# Altium PCB ESense.PcbDoc (part 1 of 3)
Units mil, origin at the board's own origin, x right, y up, seen from the top; angles counter-clockwise.
Board outline 9200 x 6300 mil, 4 copper layers (Top Layer, GND, POWER, Bottom Layer); 365 components, 215 nets, 1056 pads, 220 vias.
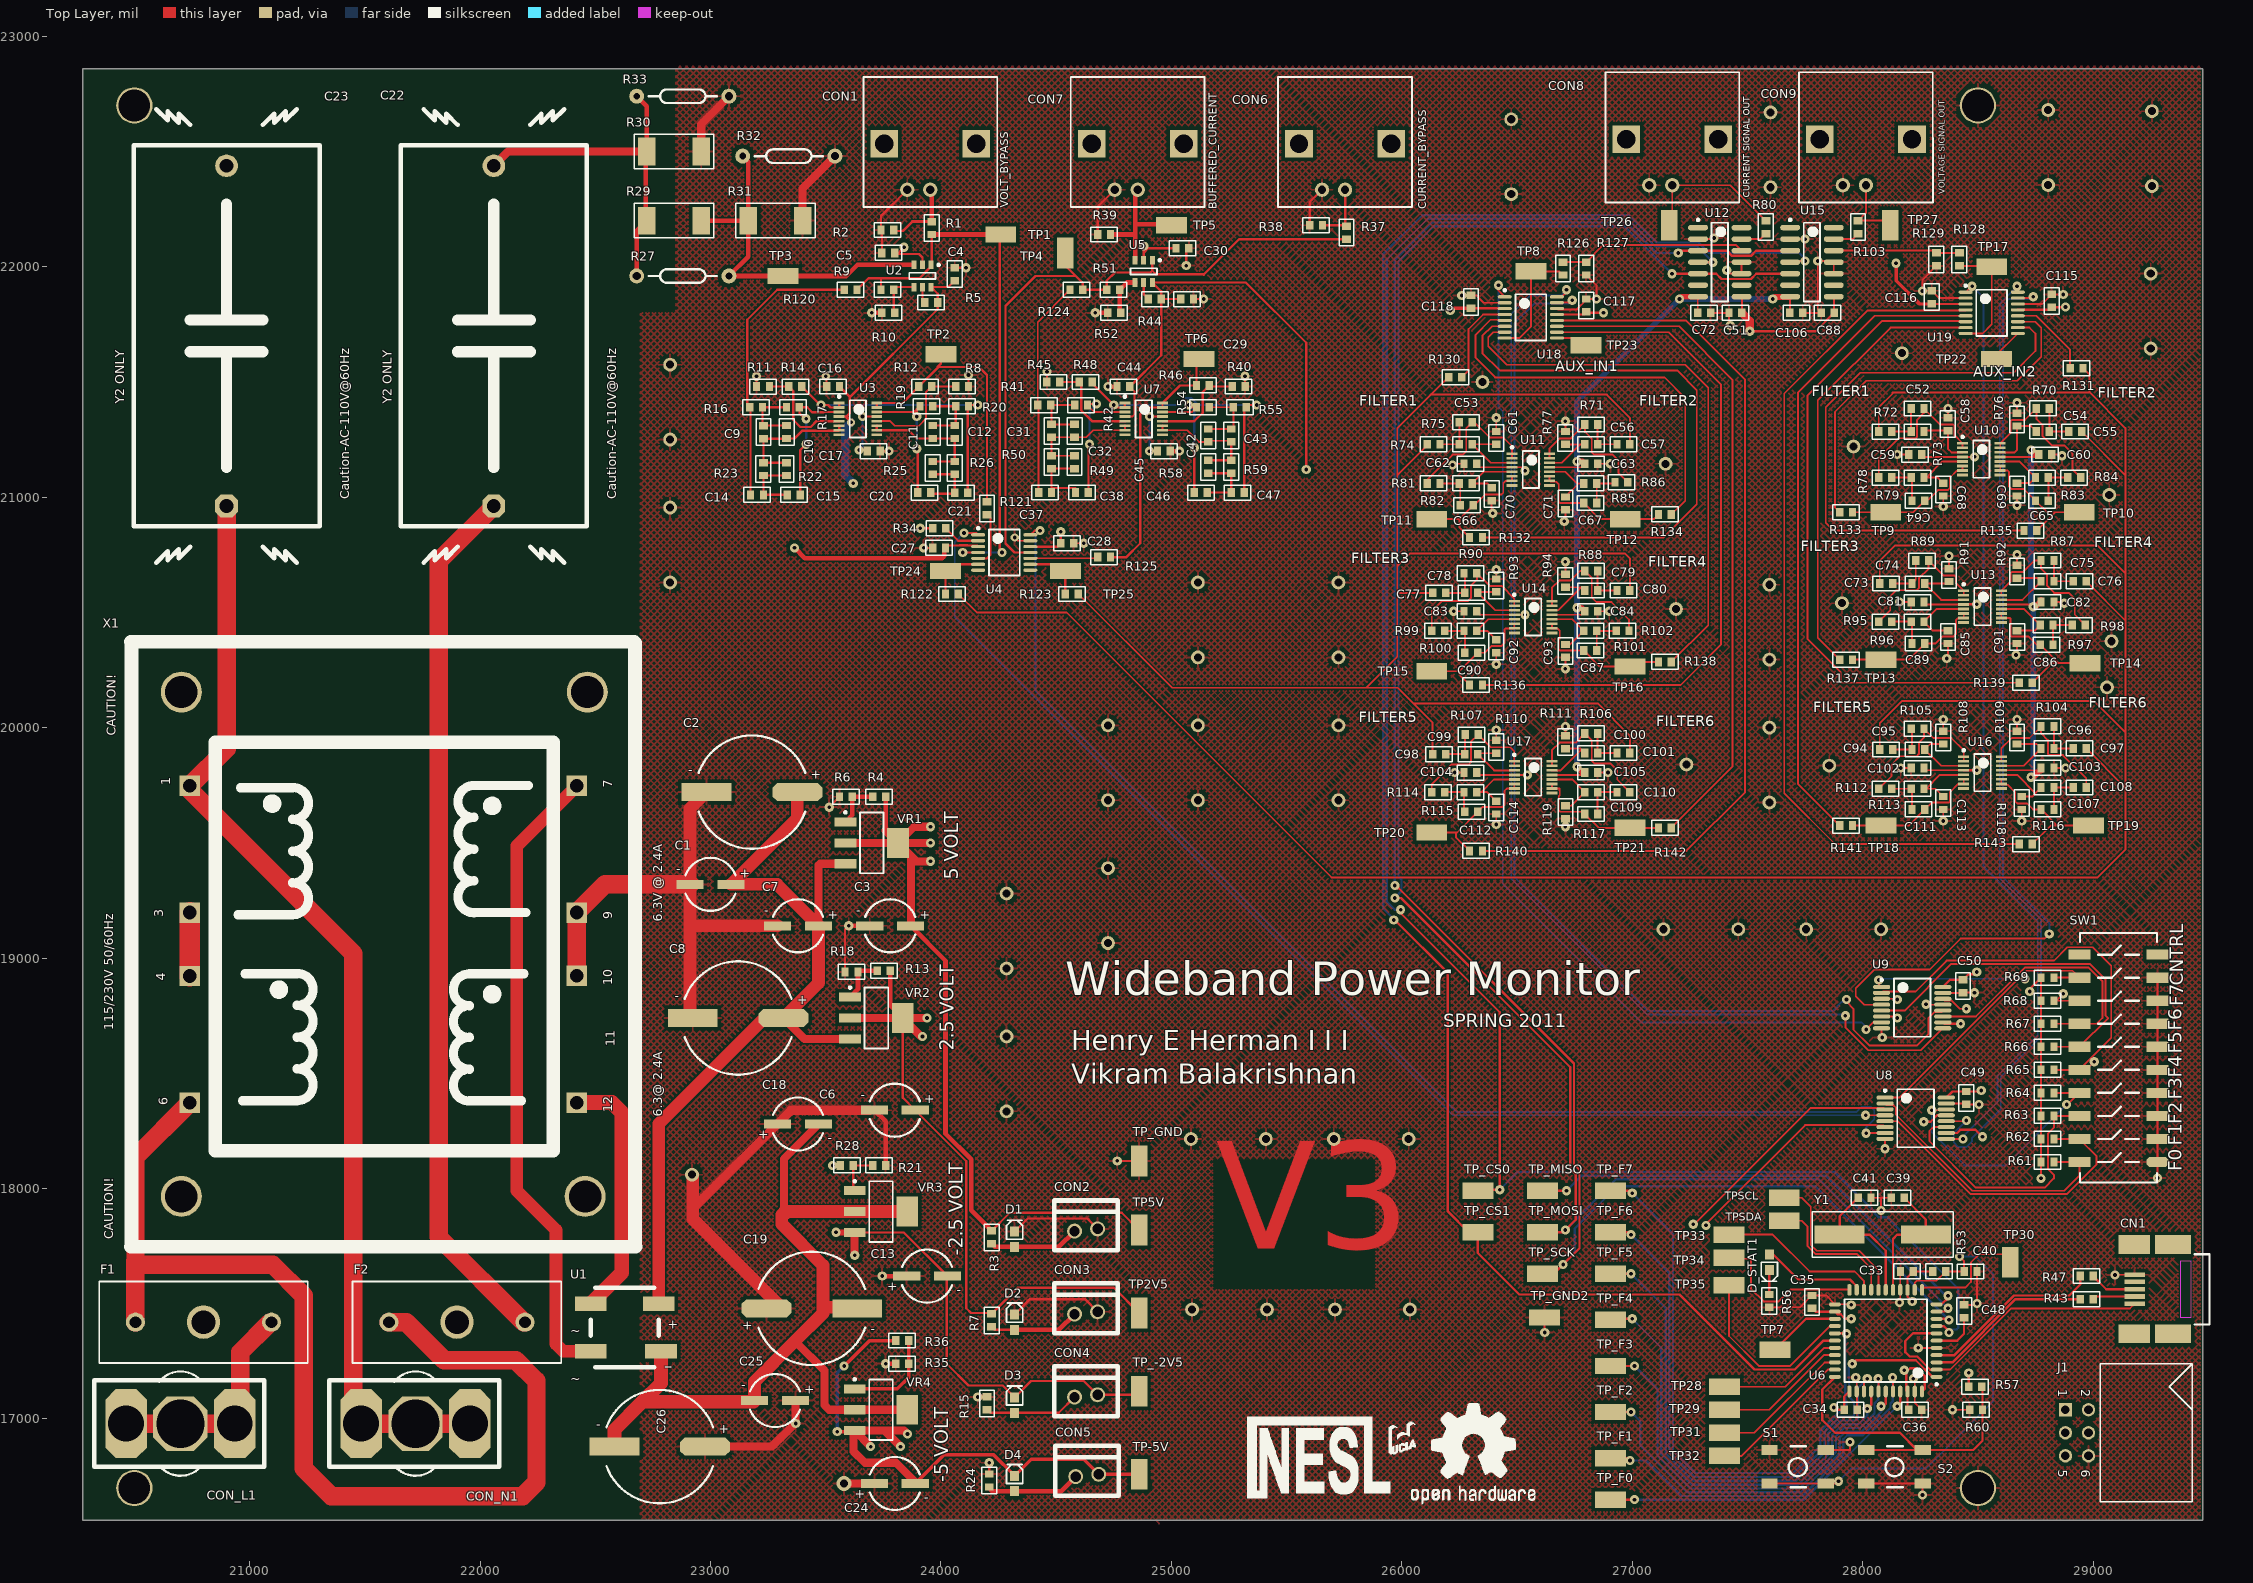
[diagram p0: Top Layer view]
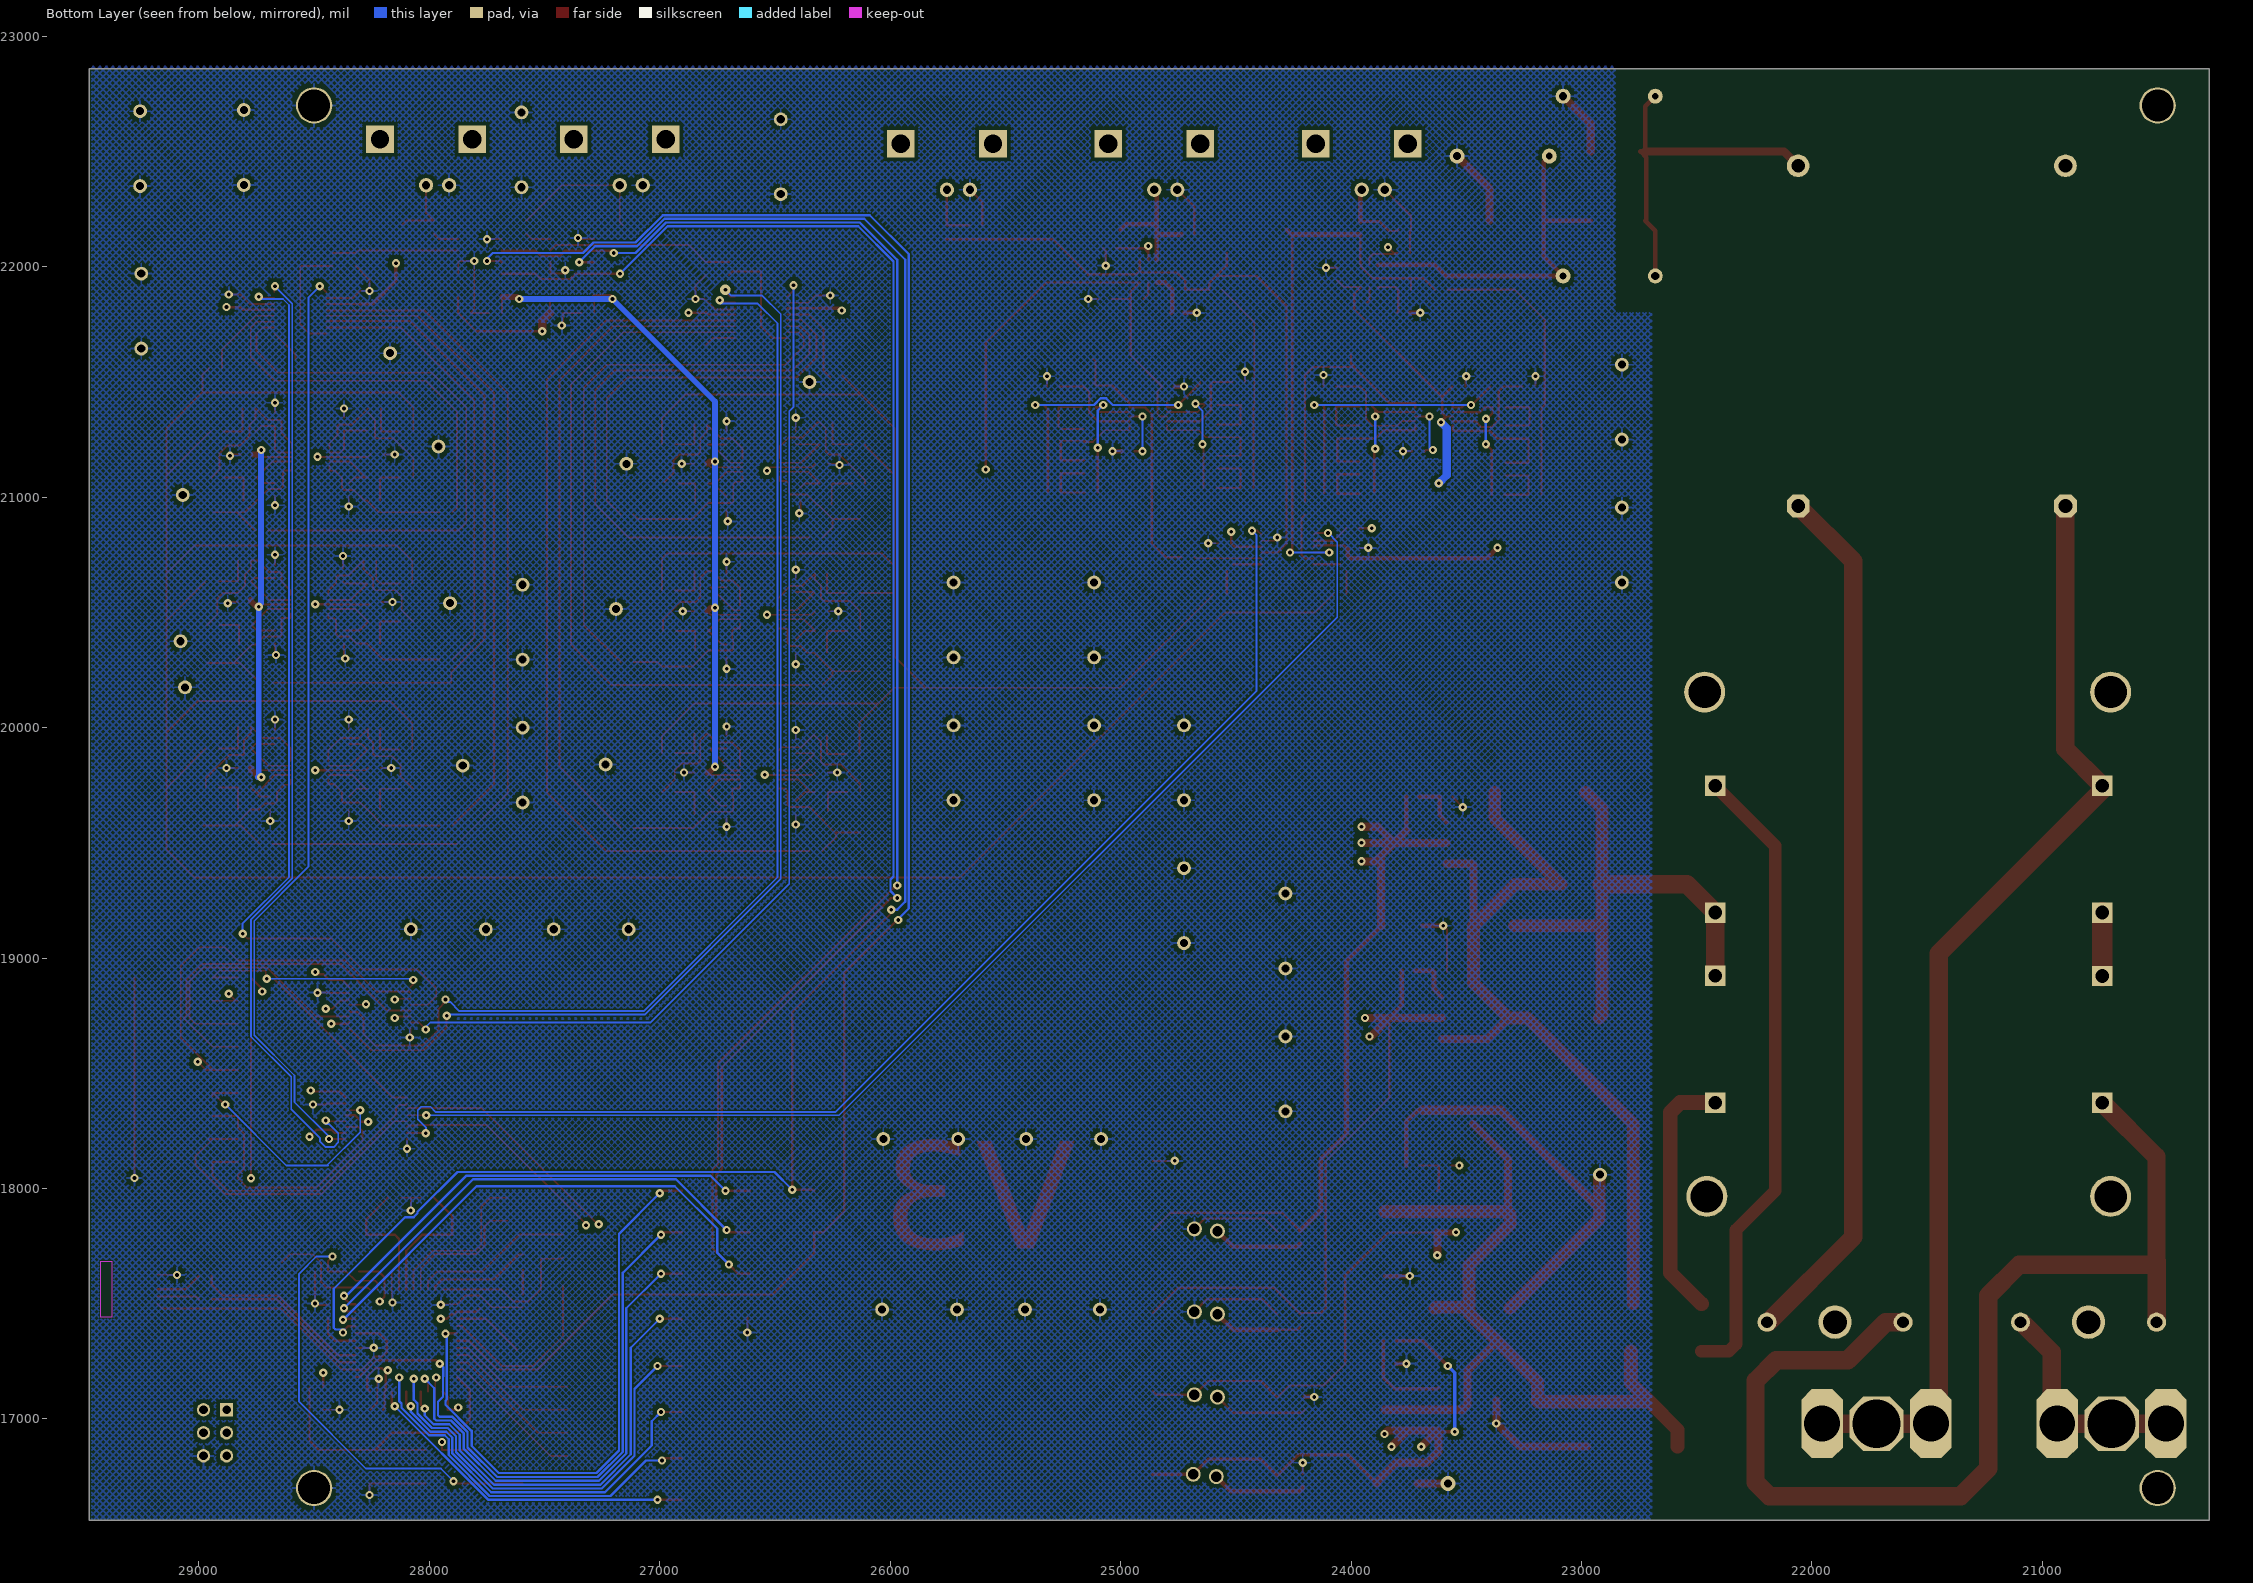
[diagram p1: Bottom Layer view, seen from below]
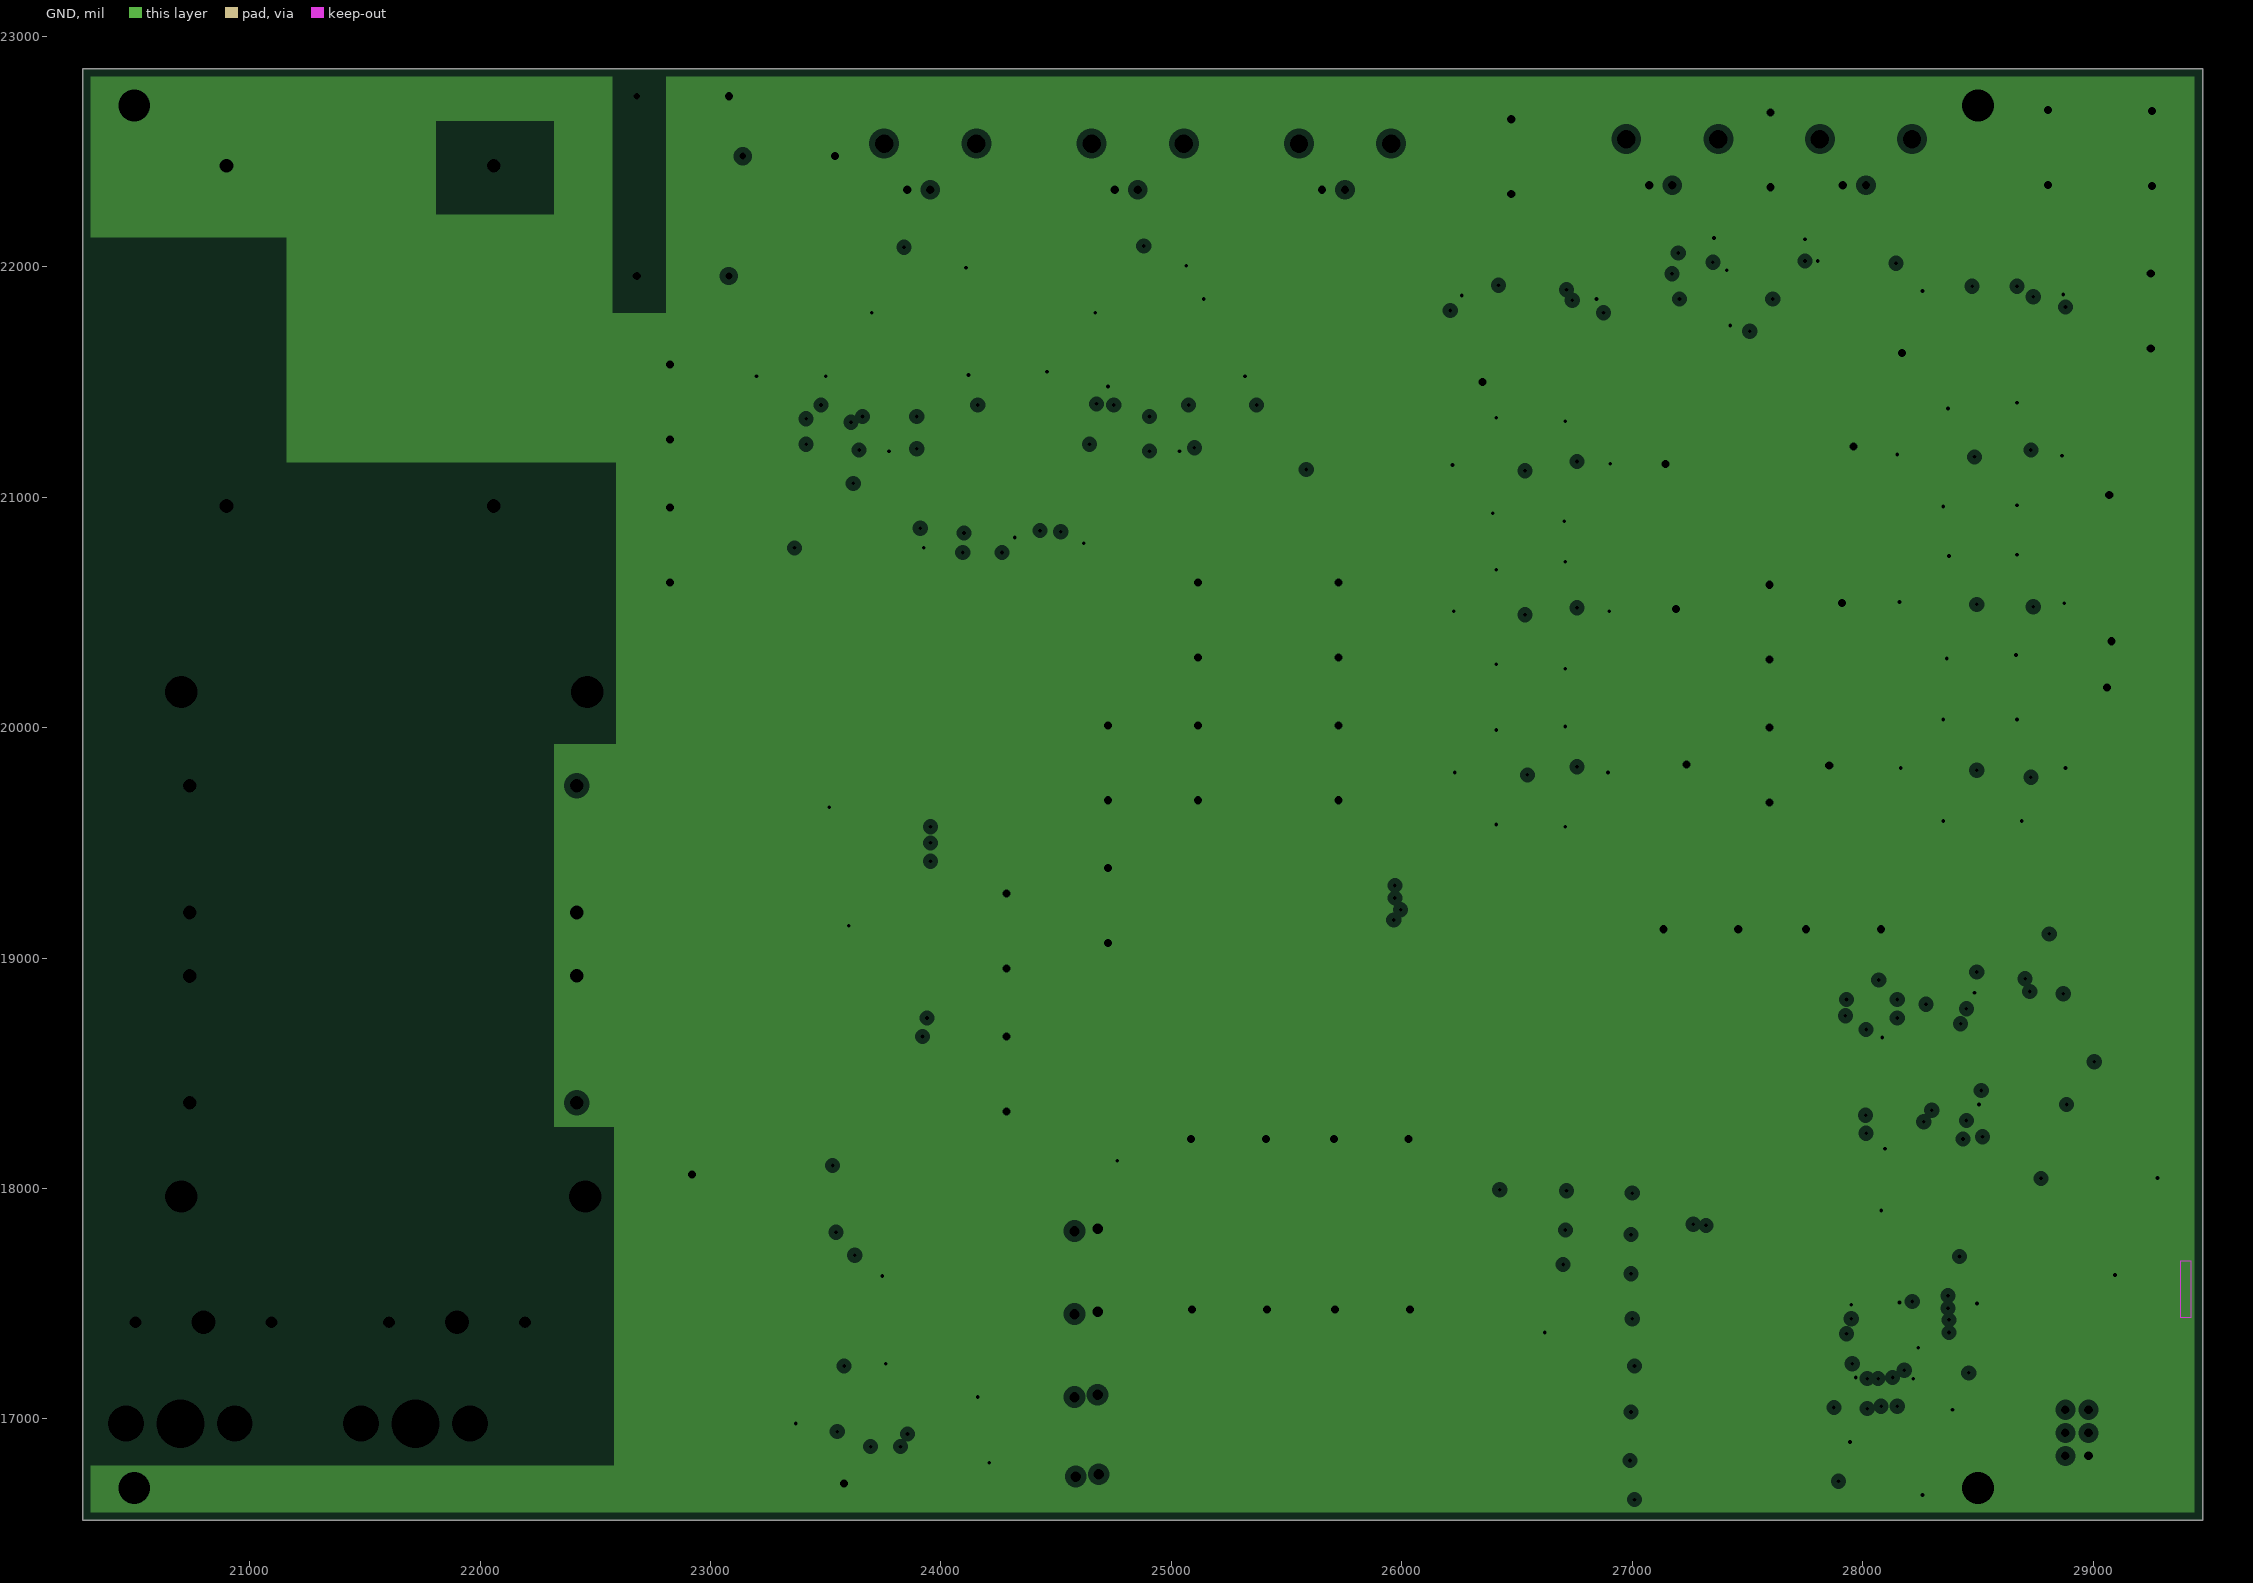
[diagram p2: GND, clearances drawn from the general rule]
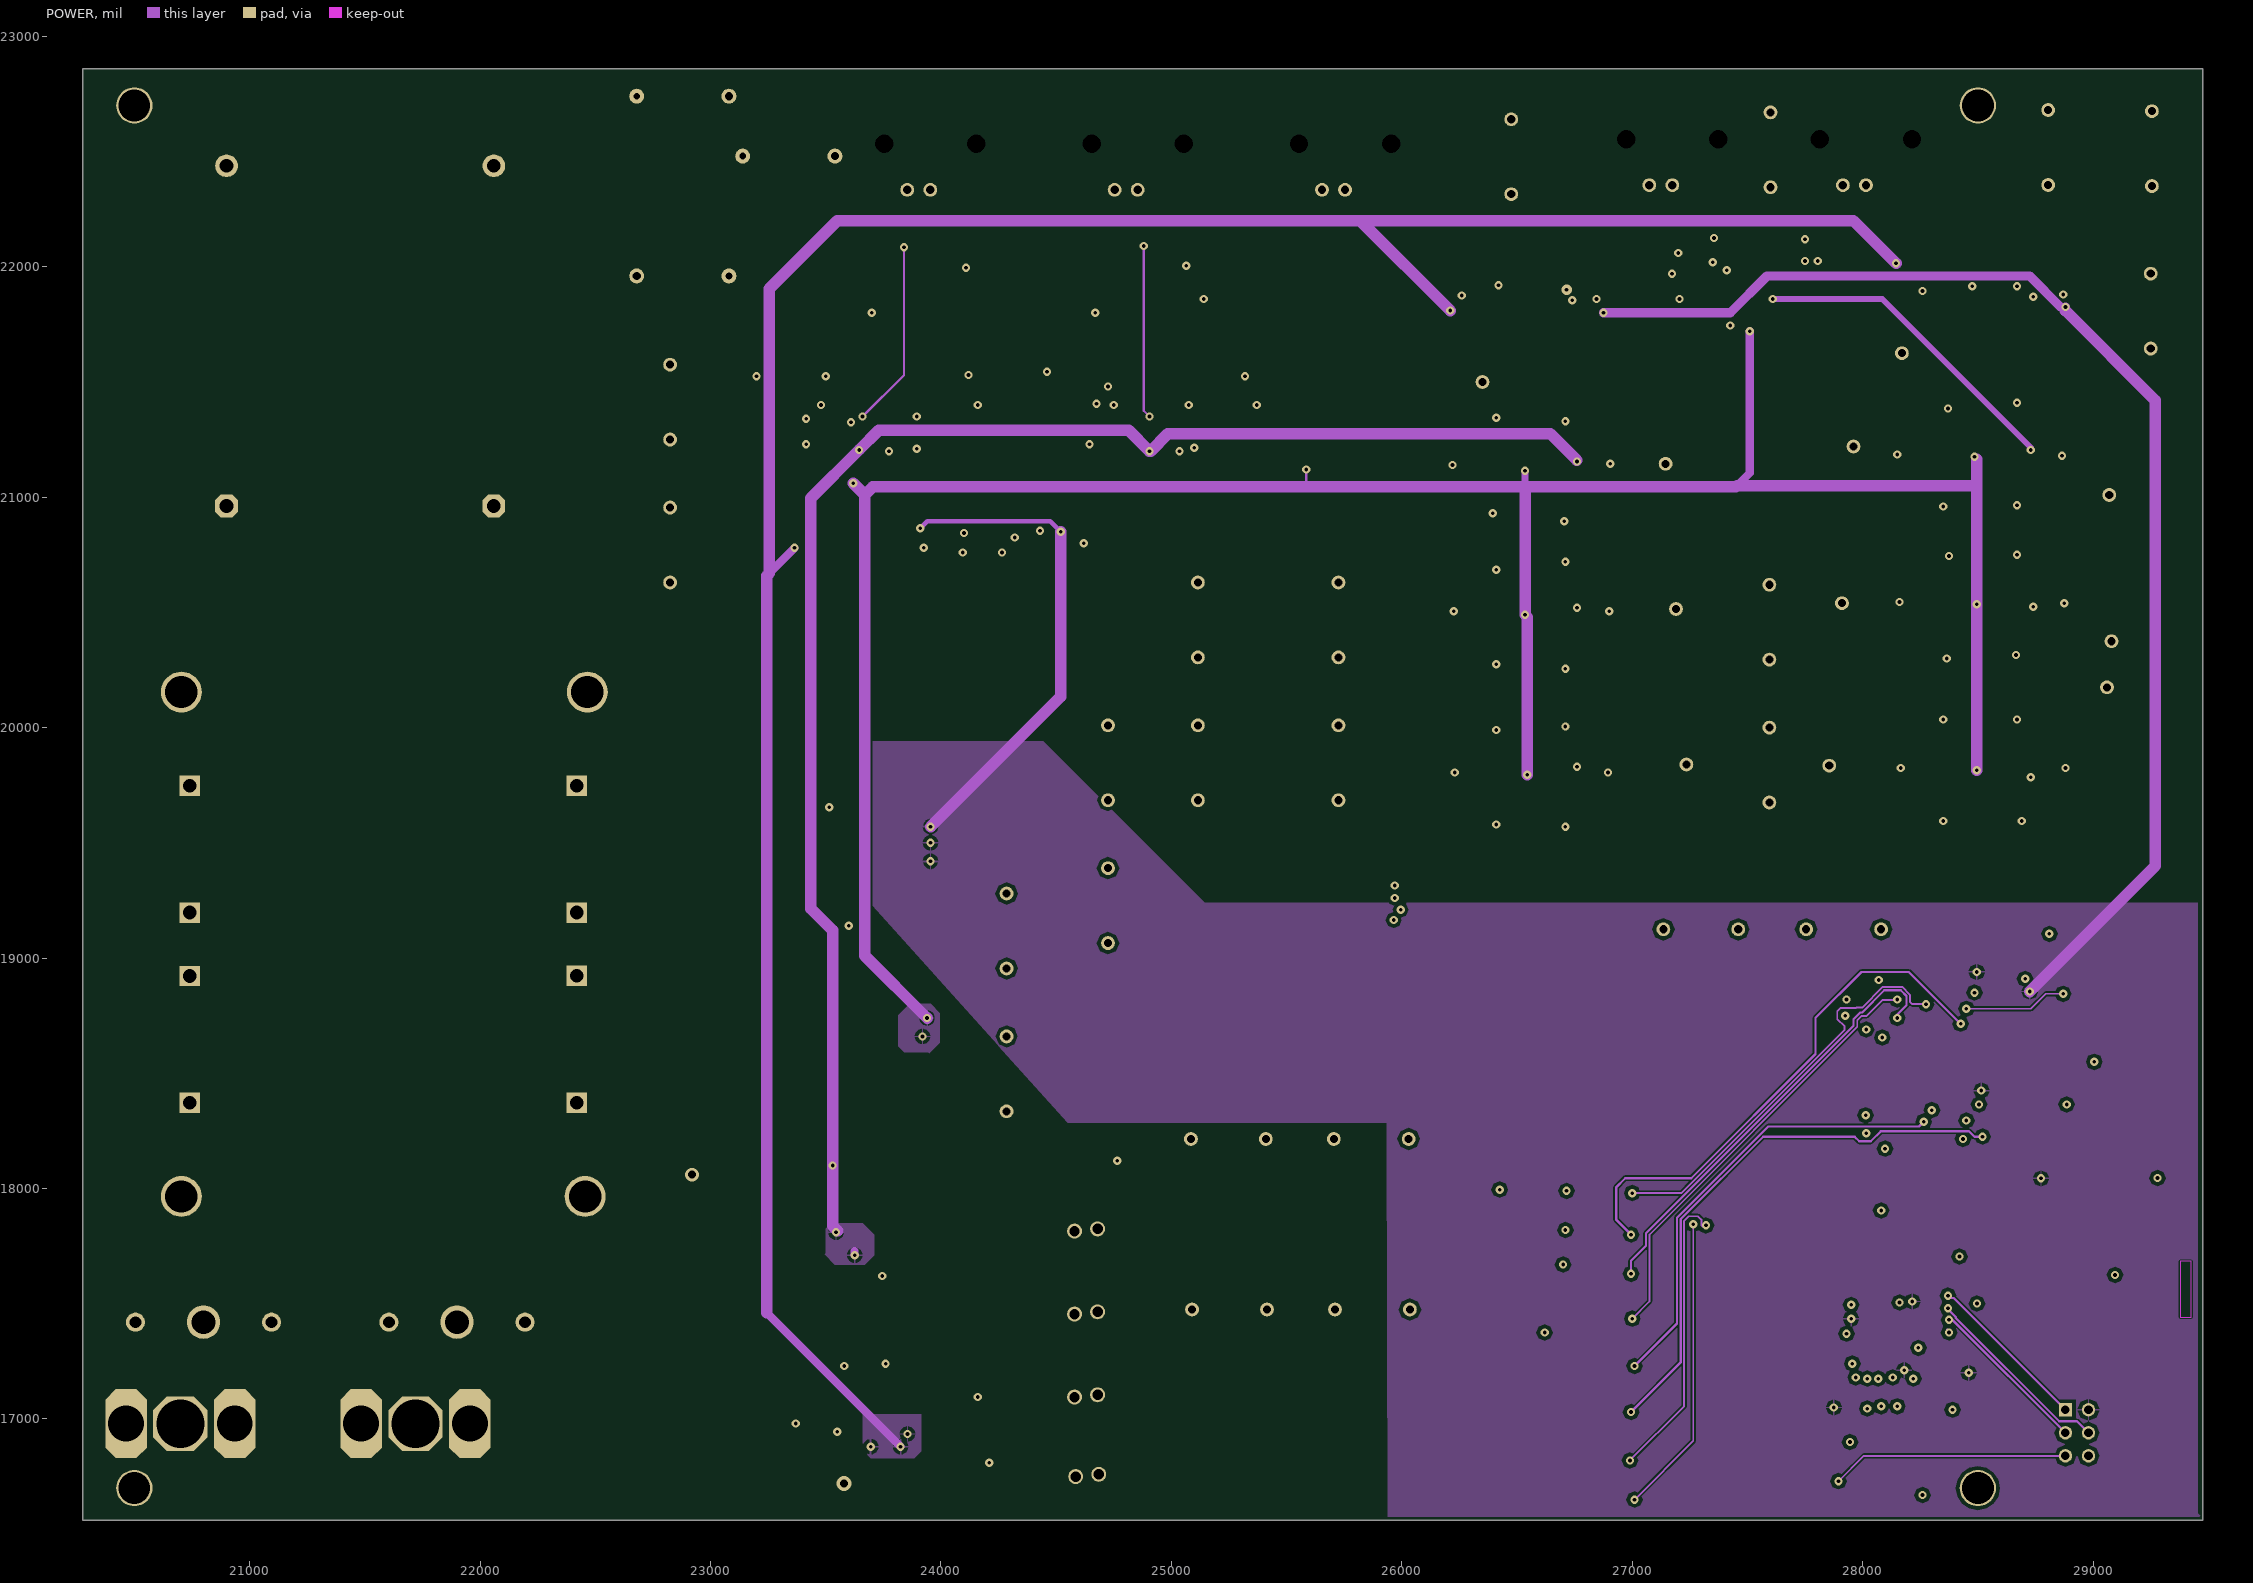
[diagram p3: POWER]

## Layer stack, top to bottom
Top Layer: signal copper 1.4
Dielectric: core 12.6, FR-4, Dk 4.8
GND: plane copper 1.4, net GND
Dielectric: prepreg 12.6, FR-4, Dk 4.8
POWER: signal copper 1.4
Dielectric: core 12.6, FR-4, Dk 4.8
Bottom Layer: signal copper 1.4

## Board outline
20275,16560 29475,16560 29475,22860 20275,22860 20275,16560

## Design rules (kind name [scope] priority, off if disabled: settings)
Clearance "Polygon Clearance" [OnLayer('GND')Or InPoly Or InLayerClass('GND') vs IsPad Or IsVia] p1: gap=15
Clearance "Clearance~Sunstone Circuits" [All] p2: gap=6 // Sunstone Circuits Minimum Clearance Rule (MLB~4&6 Layer Designs)
Height [All] p1: minheight=0 maxheight=10000 prefheight=500
HoleSize "HoleSize~Sunstone Circuits" [All] p1: absolutevalues=TRUE maxlimit=251 minlimit=8 maxpercent=80.000 minpercent=20.000 // Sunstone Circuits Hole Size Rule (MLB~4&6 Layer Designs)
HoleSize Testpoint [All] p2: absolutevalues=TRUE maxlimit=100 minlimit=1 maxpercent=80.000 minpercent=20.000
HoleSize TestPointUsage [All] p3: absolutevalues=TRUE maxlimit=100 minlimit=1 maxpercent=80.000 minpercent=20.000
MinimumAnnularRing "MinimumAnnularRing~Sunstone Circuits" [All] p1: minimumring=8 // Sunstone Circuits Minimum Annular Ring (MLB~4&6 Layer Designs)
MinimumSolderMaskSliver [All] p1: minsoldermaskwidth=4
PlaneClearance "PlaneClearance~Sunstone Circuits" [All] p1: clearance=25 // Sunstone Circuits Power Plane Clearance Rule (MLB~4&6 Layer Designs)
PlaneConnect "PlaneConnect~Sunstone Circuits" [All] p1: planeconnectstyle=Relief reliefexpansion=10 reliefentries=4 reliefconductorwidth=10 reliefairgap=15 // Sunstone Circuits Power Plane Connect Rule (MLB~4&6 Layer Designs)
PolygonConnect "PolygonConnect~Sunstone Circuits" [All] p1: connectstyle=Relief reliefconductorwidth=8 reliefentries=4 polygonreliefangle="90 Angle" // Sunstone Circuits Polygon Connect Style (MLB~4&6 Layer Designs)
RoutingVias "RoutingVias~Sunstone Circuits" [All] p1: holewidth=16 width=30 viastyle="Through Hole" minholewidth=8 minwidth=24 maxholewidth=75 maxwidth=125 // Sunstone Circuits Routing Vias Rule (MLB~4&6 Layer Designs)
ShortCircuit "ShortCircuit~Sunstone Circuits" [All] p1: allowed=FALSE // Sunstone Circuits Short Circuit Rule~Do Not Allow (MLB~4&6 Layer Designs)
SilkToSilkClearance [All] p1: silktosilkclearance=4
SilkscreenOverComponentPads [All] p1: minsilkscreentomaskgap=4
SolderMaskExpansion "SolderMaskExpansion~Sunstone Circuits" [All] p1: expansion=3 // Sunstone Circuits Solder Mask Expansion Rule (MLB~4&6 Layer Designs)
ViasUnderSMD "ViasUnderSMD~Sunstone Circuits" [All] p1: allowed=FALSE // Sunstone Circuits Vias Under SMD~Do Not Allow (MLB~4&6 Layer Designs)
Width "Width~Sunstone Circuits" [All] p1: maxlimit=100 minlimit=6 preferedwidth=10 // Sunstone Circuits Minimum Width Rule (MLB~4&6 Layer Designs)
20 further rules are at their usual default settings.

## Classes and differential pairs
net class F_SEL[0..7]: F_SEL0 F_SEL1 F_SEL2 F_SEL3 F_SEL4 F_SEL5 F_SEL6 F_SEL7
net class F_MCU_SEL[0..7]: F_MCU_SEL0 F_MCU_SEL1 F_MCU_SEL2 F_MCU_SEL3 F_MCU_SEL4 F_MCU_SEL5 F_MCU_SEL6 F_MCU_SEL7
net class MOSI,SCK,CS[0..9]: MOSI,SCK,CS0 MOSI,SCK,CS1 MOSI,SCK,CS2 MOSI,SCK,CS3 MOSI,SCK,CS4 MOSI,SCK,CS5 MOSI,SCK,CS6 MOSI,SCK,CS7 MOSI,SCK,CS8 MOSI,SCK,CS9

## Components (designator, comment, footprint, x,y, rotation, side; value= is the part's Value field where it differs from the comment)
C1 "10u Farads 20%" CAP-SMD-POL-5mmDia 23000,19320 r180 top
C2 "1000u Farads 20%" CAP-CAN-SMD-POL-12.5mmDia 23180,19720 r180 top
C3 "10u Farads 20%" CAP-SMD-POL-5mmDia 23780,19140 r180 top
C4 "1u Farads 10%" SM/C_0603 24060,21940 r90 top
C5 "1u Farads 10%" SM/C_0603 23800,22060 r180 top
C6 "10u Farads 20%" CAP-SMD-POL-5mmDia 23800,18340 r180 top
C7 "10u Farads 20%" CAP-SMD-POL-5mmDia 23380,19140 r180 top
C8 "1000u Farads 20%" CAP-CAN-SMD-POL-12.5mmDia 23120,18740 r180 top
C9 "1000p Farads 1%" SM/C_0603 23230,21254 r90 top
C10 "1000p Farads 1%" SM/C_0603 23330,21255 r90 top
C11 "1000p Farads 1%" SM/C_0603 23965,21255 r90 top
C12 "1000p Farads 1%" SM/C_0603 24060,21255 r90 top
C13 "10u Farads 20%" CAP-SMD-POL-5mmDia 23940,17620 r0 top
C14 "1000p Farads 1%" SM/C_0603 23230,21010 r180 top
C15 "1000p Farads 1%" SM/C_0603 23390,21010 r180 top
C16 "1u Farads 10%" SM/C_0603 23560,21480 r180 top
C17 "1u Farads 10%" SM/C_0603 23680,21200 r0 top
C18 "10u Farads 20%" CAP-SMD-POL-5mmDia 23380,18280 r0 top
C19 "1000u Farads 20%" CAP-CAN-SMD-POL-12.5mmDia 23440,17480 r0 top
C20 "1000p Farads 1%" SM/C_0603 23900,21020 r0 top
C21 "1000p Farads 1%" SM/C_0603 24060,21019 r0 top
C22 "1uF Farads 10%" Y2-Caps-Epocs-1uF-10% 22060,21700 r90 top
C23 "1uF Farads 10%" Y2-Caps-Epocs-1uF-10% 20900,21700 r90 top
C24 "10u Farads 20%" CAP-SMD-POL-5mmDia 23800,16720 r0 top
C25 "10u Farads 20%" CAP-SMD-POL-5mmDia 23280,17080 r180 top
C26 "1000u Farads 20%" CAP-CAN-SMD-POL-12.5mmDia 22780,16880 r180 top
C27 "1u Farads 10%" SM/C_0603 24020,20780 r180 top
C28 "1u Farads 10%" SM/C_0603 24520,20800 r0 top
C29 "1u Farads 10%" SM/C_0603 25040,21860 r0 top
C30 "1u Farads 10%" SM/C_0603 25020,22080 r0 top
C31 "1000p Farads 1%" SM/C_0603 24480,21260 r90 top
C32 "1000p Farads 1%" SM/C_0603 24580,21260 r90 top
C33 "1u Farads 10%" SM/C_0603 28220,17640 r180 top
C34 "1u Farads 10%" SM/C_0603 27920,17040 r0 top
C35 "1u Farads 10%" SM/C_0603 27780,17480 r90 top
C36 "1u Farads 10%" SM/C_0603 28200,17040 r0 top
C37 "1000p Farads 1%" SM/C_0603 24480,21020 r180 top
C38 "1000p Farads 1%" SM/C_0603 24640,21020 r180 top
C39 "22p Farads 10%" SM/C_0603 28180,17960 r180 top
C40 "1u Farads 10%" SM/C_0603 28440,17640 r0 top
C41 "22p Farads 10%" SM/C_0603 27980,17960 r0 top
C42 "1000p Farads 1%" SM/C_0603 25160,21240 r90 top
C43 "1000p Farads 1%" SM/C_0603 25260,21240 r90 top
C44 "1u Farads 10%" SM/C_0603 24820,21480 r180 top
C45 "1u Farads 10%" SM/C_0603 24940,21200 r0 top
C46 "1000p Farads 1%" SM/C_0603 25100,21020 r0 top
C47 "1000p Farads 1%" SM/C_0603 25260,21020 r0 top
C48 "1u Farads 10%" SM/C_0603 28440,17440 r90 top
C49 "1u Farads 10%" SM/C_0603 28450,18365 r90 top
C50 "1u Farads 10%" SM/C_0603 28435,18850 r90 top
C51 "1u Farads 10%" SM/C_0603 27420,21800 r0 top
C52 "1000p Farads 1%" SM/C_0603 28210,21385 r0 top
C53 "1000p Farads 1%" SM/C_0603 26250,21325 r0 top
C54 "1000p Farads 1%" SM/C_0603 28810,21285 r180 top
C55 "1000p Farads 1%" SM/C_0603 28950,21285 r180 top
C56 "1000p Farads 1%" SM/C_0603 26850,21230 r180 top
C57 "1000p Farads 1%" SM/C_0603 26990,21230 r180 top
C58 "1000p Farads 1%" SM/C_0603 28370,21345 r270 top
C59 "1u Farads 10%" SM/C_0603 28200,21185 r0 top
C60 "1u Farads 10%" SM/C_0603 28820,21185 r180 top
C61 "1000p Farads 1%" SM/C_0603 26410,21285 r270 top
C62 "1u Farads 10%" SM/C_0603 26270,21145 r0 top
C63 "1u Farads 10%" SM/C_0603 26850,21145 r180 top
C64 "1000p Farads 1%" SM/C_0603 28270,20985 r180 top
C65 "47p Farads 1%" SM/C_0603 28750,20985 r0 top
C66 "1000p Farads 1%" SM/C_0603 26310,20965 r180 top
C67 "47p Farads 1%" SM/C_0603 26790,20975 r0 top
C68 "330p Farads 1%" SM/C_0603 28350,21005 r90 top
C69 "33pF Farads 1%" SM/C_0603 28670,21005 r90 top
C70 "330p Farads 1%" SM/C_0603 26390,20985 r90 top
C71 "33pF Farads 1%" SM/C_0603 26710,20945 r90 top
C72 "1u Farads 10%" SM/C_0603 27340,21800 r180 top
C73 "47p Farads 1%" SM/C_0603 28130,20625 r180 top
C74 "47p Farads 1%" SM/C_0603 28270,20625 r180 top
C75 "47p Farads 1%" SM/C_0603 28830,20635 r180 top
C76 "47p Farads 1%" SM/C_0603 28970,20635 r180 top
C77 "47p Farads 1%" SM/C_0603 26190,20585 r180 top
C78 "47p Farads 1%" SM/C_0603 26330,20585 r180 top
C79 "47p Farads 1%" SM/C_0603 26850,20595 r180 top
C80 "47p Farads 1%" SM/C_0603 26990,20595 r180 top
C81 "1u Farads 10%" SM/C_0603 28210,20545 r0 top
C82 "1u Farads 10%" SM/C_0603 28830,20545 r180 top
C83 "1u Farads 10%" SM/C_0603 26270,20505 r0 top
C84 "1u Farads 10%" SM/C_0603 26850,20505 r180 top
C85 "33pF Farads 1%" SM/C_0603 28370,20365 r90 top
C86 "47p Farads 1%" SM/C_0603 28770,20360 r0 top
C87 "47p Farads 1%" SM/C_0603 26790,20335 r0 top
C88 "1u Farads 10%" SM/C_0603 27820,21800 r0 top
C89 "47p Farads 1%" SM/C_0603 28270,20365 r180 top
C90 "47p Farads 1%" SM/C_0603 26330,20325 r180 top
C91 "33pF Farads 1%" SM/C_0603 28670,20365 r90 top
C92 "33pF Farads 1%" SM/C_0603 26410,20325 r90 top
C93 "33pF Farads 1%" SM/C_0603 26710,20305 r90 top
C94 "47p Farads 1%" SM/C_0603 28130,19905 r180 top
C95 "47p Farads 1%" SM/C_0603 28270,19905 r180 top
C96 "47p Farads 1%" SM/C_0603 28830,19910 r180 top
C97 "47p Farads 1%" SM/C_0603 28970,19910 r180 top
C98 "47p Farads 1%" SM/C_0603 26190,19885 r180 top
C99 "47p Farads 1%" SM/C_0603 26330,19885 r180 top
C100 "47p Farads 1%" SM/C_0603 26850,19890 r180 top
C101 "47p Farads 1%" SM/C_0603 26990,19890 r180 top
C102 "1u Farads 10%" SM/C_0603 28210,19825 r0 top
C103 "1u Farads 10%" SM/C_0603 28830,19825 r180 top
C104 "1u Farads 10%" SM/C_0603 26270,19805 r0 top
C105 "1u Farads 10%" SM/C_0603 26850,19805 r180 top
C106 "1u Farads 10%" SM/C_0603 27740,21800 r180 top
C107 "47p Farads 1%" SM/C_0603 28830,19740 r180 top
C108 "47p Farads 1%" SM/C_0603 28970,19740 r180 top
C109 "47p Farads 1%" SM/C_0603 26850,19720 r180 top
C110 "47p Farads 1%" SM/C_0603 26990,19720 r180 top
C111 "47p Farads 1%" SM/C_0603 28270,19645 r180 top
C112 "47p Farads 1%" SM/C_0603 26330,19635 r180 top
C113 "33pF Farads 1%" SM/C_0603 28350,19645 r90 top
C114 "33pF Farads 1%" SM/C_0603 26410,19625 r90 top
C115 "1u Farads 10%" SM/C_0603 28820,21880 r270 top
C116 "1u Farads 10%" SM/C_0603 28300,21840 r90 top
C117 "1u Farads 10%" SM/C_0603 26800,21860 r270 top
C118 "1u Farads 10%" SM/C_0603 26300,21820 r90 top
CN1 "Mini B Socket R/A USB Type Per Spec" MOLEX/54819-0579 29180,17500 r90 top
CON1 "5227161-1" BNC-RightAngle-PCB-50Ohm-Termination 23940,22840 r0 top
CON2 "640456-2" M02-LockingHeader-100mil-pitch 24580,17820 r0 top
CON3 "640456-2" M02-LockingHeader-100mil-pitch 24580,17460 r0 top
CON4 "640456-2" M02-LockingHeader-100mil-pitch 24580,17100 r0 top
CON5 "640456-2" M02-LockingHeader-100mil-pitch 24585,16755 r0 top
CON6 "5227161-1" BNC-RightAngle-PCB-50Ohm-Termination 25740,22840 r0 top
CON7 "5227161-1" BNC-RightAngle-PCB-50Ohm-Termination 24840,22840 r0 top
CON8 "5227161-1" BNC-RightAngle-PCB-50Ohm-Termination 27160,22860 r0 top
CON9 "5227161-1" BNC-RightAngle-PCB-50Ohm-Termination 28000,22860 r0 top
CON_L1 "1299" LOW-PROFILE-SCREWTERMINAL 20700,16980 r180 top
CON_N1 "1299" LOW-PROFILE-SCREWTERMINAL 21720,16980 r180 top
D1 "red" LITEON/LED/0603 24320,17780 r90 top
D2 "red" LITEON/LED/0603 24320,17420 r90 top
D3 "red" LITEON/LED/0603 24320,17060 r90 top
D4 "red" LITEON/LED/0603 24320,16720 r90 top
D_STAT1 "red" LITEON/LED/0603 27595,17680 r270 top
F1 "110V @ 2 AMP Fast Blow" WICKMANN/WK0011-ND 20800,17420 r0 top
F2 "110V @ 100 milliamp Fast Blow" WICKMANN/WK0011-ND 21900,17420 r180 top
J1 "Atmel ISP 2x3" FCI/75867/6 28880,17040 r270 top
R1 "0 Ohms 0" SM/R_0603 23960,22140 r90 top
R2 "50 Ohm 1%" SM/R_0603 23740,22160 r0 top
R3 "330 Ohms 1%" SM/C_0603 24220,17760 r90 top
R4 "1k Ohms 1%" SM/C_0603 23760,19700 r180 top
R5 "10k ohm 1%" SM/C_0603 23930,21845 r0 top
R6 "3k Ohms 1%" SM/C_0603 23560,19700 r0 top
R7 "330 Ohms 1%" SM/C_0603 24220,17400 r90 top
R8 "1k Ohms 1%" SM/C_0603 24120,21480 r180 top
R9 "1k Ohms 1%" SM/C_0603 23740,21900 r0 top
R10 "1k Ohms 1%" SM/C_0603 23800,21800 r180 top
R11 "1k Ohms 1%" SM/C_0603 23200,21480 r0 top
R12 "1k Ohms 1%" SM/C_0603 23960,21480 r180 top
R13 "1k Ohms 1%" SM/C_0603 23780,18945 r180 top
R14 "1k Ohms 1%" SM/C_0603 23340,21480 r0 top
R15 "330 Ohms 1%" SM/C_0603 24200,17040 r90 top
R16 "2.7M Ohm 1%" SM/R_0603 23170,21390 r0 top
R17 "2.7M Ohm 1%" SM/R_0603 23330,21390 r0 top
R18 "1k Ohms 1%" SM/C_0603 23640,18940 r180 top
R19 "2.7M Ohm 1%" SM/R_0603 23965,21395 r180 top
R20 "2.7M Ohm 1%" SM/R_0603 24120,21395 r180 top
R21 "1k Ohms 1%" SM/C_0603 23760,18100 r180 top
R22 "2.7M Ohm 1%" SM/R_0603 23330,21150 r270 top
R23 "2.7M Ohm 1%" SM/R_0603 23230,21150 r270 top
R24 "330 Ohms 1%" SM/C_0603 24210,16705 r90 top
R25 "2.7M Ohm 1%" SM/R_0603 23965,21155 r270 top
R26 "2.7M Ohm 1%" SM/R_0603 24060,21155 r270 top
R27 "30k Ohms 1%" "Resistor-3.2mm x 1.70mm" 22880,21960 r0 top
R28 "1k Ohms 1%" SM/C_0603 23620,18100 r180 top
R29 "30k Ohms 1%" SM/R_2512 22960,22200 r180 top
R30 "30k Ohms 1%" SM/R_2512 22960,22500 r180 top
R31 "150 ohms 1%" SM/R_2512 23400,22200 r180 top
R32 "30k Ohms 1%" "Resistor-3.2mm x 1.70mm" 23340,22480 r180 top
R33 "30k Ohms 1%" "Resistor-3.2mm x 1.70mm" 22880,22740 r180 top
R34 "10k ohm 1%" SM/C_0603 23965,20865 r0 top
R35 "3k Ohms 1%" SM/C_0603 23860,17240 r180 top
R36 "1k Ohms 1%" SM/C_0603 23860,17340 r180 top
R37 "0 Ohms 0" SM/R_0603 25760,22120 r90 top
R38 "50 Ohm 1%" SM/R_0603 25600,22180 r0 top
R39 "50 Ohm 1%" SM/R_0603 24680,22140 r0 top
R40 "1k Ohms 1%" SM/C_0603 25320,21480 r180 top
R41 "2.7M Ohm 1%" SM/R_0603 24420,21400 r0 top
R42 "2.7M Ohm 1%" SM/R_0603 24580,21400 r0 top
R43 "22 ohms 1%" SM/C_0603 29000,17520 r180 top
R44 "10k ohm 1%" SM/C_0603 24900,21860 r0 top
R45 "1k Ohms 1%" SM/C_0603 24460,21500 r0 top
R46 "1k Ohms 1%" SM/C_0603 25165,21485 r180 top
R47 "22 ohms 1%" SM/C_0603 29000,17620 r180 top
R48 "1k Ohms 1%" SM/C_0603 24600,21500 r0 top
R49 "2.7M Ohm 1%" SM/R_0603 24580,21180 r270 top
R50 "2.7M Ohm 1%" SM/R_0603 24480,21180 r270 top
R51 "1k Ohms 1%" SM/C_0603 24720,21900 r0 top
R52 "1k Ohms 1%" SM/C_0603 24780,21800 r180 top
R53 "10k ohm 1%" SM/C_0603 28360,17640 r180 top
R54 "2.7M Ohm 1%" SM/R_0603 25165,21390 r180 top
R55 "2.7M Ohm 1%" SM/R_0603 25325,21390 r180 top
R56 "330 Ohms 1%" SM/C_0603 27595,17540 r270 top
R57 "1k Ohms 1%" SM/C_0603 28460,17140 r0 top
R58 "2.7M Ohm 1%" SM/R_0603 25160,21160 r270 top
R59 "2.7M Ohm 1%" SM/R_0603 25260,21160 r270 top
R60 "1k Ohms 1%" SM/C_0603 28520,17040 r180 top
R61 "10k ohm 1%" SM/C_0603 28830,18115 r180 top
R62 "10k ohm 1%" SM/C_0603 28830,18215 r180 top
R63 "10k ohm 1%" SM/C_0603 28830,18315 r180 top
R64 "10k ohm 1%" SM/C_0603 28830,18415 r180 top
R65 "10k ohm 1%" SM/C_0603 28830,18515 r180 top
R66 "10k ohm 1%" SM/C_0603 28830,18615 r180 top
R67 "10k ohm 1%" SM/C_0603 28830,18715 r180 top
R68 "10k ohm 1%" SM/C_0603 28830,18815 r180 top
R69 "10k ohm 1%" SM/C_0603 28830,18915 r180 top
R70 "174k Ohms 1%" SM/R_0603 28810,21385 r180 top
R71 "174k Ohms 1%" SM/R_0603 26850,21315 r180 top
R72 "115k Ohm 1%" SM/R_0603 28070,21285 r0 top
R73 "115k Ohm 1%" SM/R_0603 28210,21285 r0 top
R74 "115k Ohm 1%" SM/R_0603 26110,21230 r0 top
R75 "115k Ohm 1%" SM/R_0603 26250,21230 r0 top
R76 "249k Ohms 1%" SM/C_0603 28670,21365 r270 top
R77 "249k Ohms 1%" SM/C_0603 26710,21285 r270 top
R78 "160k Ohms 1%" SM/R_0603 28070,21085 r0 top
R79 "160k Ohms 1%" SM/R_0603 28210,21085 r0 top
R80 "50 Ohm 1%" SM/R_0603 27580,22200 r270 top
R81 "160k Ohms 1%" SM/R_0603 26110,21060 r0 top
R82 "160k Ohms 1%" SM/R_0603 26250,21060 r0 top
R83 "30k Ohms 1%" SM/R_0603 28750,21085 r0 top
R84 "30k Ohms 1%" SM/R_0603 28890,21085 r0 top
R85 "30k Ohms 1%" SM/R_0603 26790,21060 r0 top
R86 "30k Ohms 1%" SM/R_0603 26925,21065 r0 top
R87 "15k Ohms 1%" SM/R_0603 28830,20725 r180 top
R88 "15k Ohms 1%" SM/R_0603 26850,20680 r180 top
R89 "33k Ohms 1%" SM/R_0603 28230,20725 r0 top
R90 "33k Ohms 1%" SM/R_0603 26270,20670 r0 top
R91 "49.9k Ohms 1%" SM/R_0603 28375,20690 r270 top
R92 "20k Ohms 1%" SM/R_0603 28670,20705 r270 top
R93 "49.9k Ohms 1%" SM/R_0603 26410,20645 r270 top
R94 "20k Ohms 1%" SM/R_0603 26710,20665 r270 top
R95 "12k Ohms 1%" SM/R_0603 28070,20460 r0 top
R96 "12k Ohms 1%" SM/R_0603 28210,20460 r0 top
R97 "6.19k Ohms 1%" SM/R_0603 28770,20445 r0 top
R98 "6.19k Ohms 1%" SM/R_0603 28910,20445 r0 top
R99 "12k Ohms 1%" SM/R_0603 26130,20420 r0 top
R100 "12k Ohms 1%" SM/R_0603 26270,20420 r0 top
R101 "6.19k Ohms 1%" SM/R_0603 26790,20420 r0 top
R102 "6.19k Ohms 1%" SM/R_0603 26930,20420 r0 top
R103 "50 Ohm 1%" SM/R_0603 27980,22200 r270 top
R104 "4.7k Ohms 1%" SM/R_0603 28830,20005 r180 top
R105 "7.5k Ohms 1%" SM/R_0603 28210,19995 r0 top
R106 "4.7k Ohms 1%" SM/R_0603 26850,19975 r180 top
R107 "7.5k Ohms 1%" SM/R_0603 26275,19970 r0 top
R108 "10k Ohms 1%" SM/R_0603 28350,19985 r270 top
R109 "4.99k Ohms 1%" SM/R_0603 28670,19985 r270 top
R110 "10k Ohms 1%" SM/R_0603 26410,19945 r270 top
R111 "4.99k Ohms 1%" SM/R_0603 26710,19965 r270 top
R112 "1.5k Ohms 1%" SM/R_0603 28070,19735 r0 top
R113 "1.5k Ohms 1%" SM/R_0603 28210,19735 r0 top
R114 "1.5k Ohms 1%" SM/R_0603 26130,19720 r0 top
R115 "1.5k Ohms 1%" SM/R_0603 26270,19720 r0 top
R116 "1k Ohms 1%" SM/C_0603 28830,19645 r180 top
R117 "1k Ohms 1%" SM/C_0603 26850,19625 r180 top
R118 "8.87K Ohms 1%" SM/C_0603 28690,19645 r90 top
R119 "8.87K Ohms 1%" SM/C_0603 26710,19605 r90 top
R120 "0 Ohms 0" SM/R_0603 23580,21900 r0 top
R121 "0 Ohms 0" SM/R_0603 24200,20980 r270 top
R122 "0 Ohms 0" SM/R_0603 24020,20580 r0 top
R123 "0 Ohms 0" SM/R_0603 24540,20580 r0 top
R124 "0 Ohms 0" SM/R_0603 24560,21900 r0 top
R125 "0 Ohms 0" SM/R_0603 24680,20740 r0 top
R126 "1k Ohms 1%" SM/C_0603 26700,22020 r270 top
R127 "1k Ohms 1%" SM/C_0603 26800,22020 r270 top
R128 "1k Ohms 1%" SM/C_0603 28420,22060 r270 top
R129 "1k Ohms 1%" SM/C_0603 28320,22060 r270 top
R130 "0 Ohms 0" SM/R_0603 26260,21520 r180 top
R131 "0 Ohms 0" SM/R_0603 28900,21560 r0 top
R132 "0 Ohms 0" SM/R_0603 26350,20825 r180 top
R133 "0 Ohms 0" SM/R_0603 27900,20935 r0 top
R134 "0 Ohms 0" SM/R_0603 27170,20925 r180 top
R135 "0 Ohms 0" SM/R_0603 28700,20855 r0 top
R136 "0 Ohms 0" SM/R_0603 26350,20185 r180 top
R137 "0 Ohms 0" SM/R_0603 27900,20295 r0 top
R138 "0 Ohms 0" SM/R_0603 27170,20285 r180 top
R139 "0 Ohms 0" SM/R_0603 28680,20195 r0 top
R140 "0 Ohms 0" SM/R_0603 26350,19465 r180 top
R141 "0 Ohms 0" SM/R_0603 27900,19575 r0 top
R142 "0 Ohms 0" SM/R_0603 27170,19565 r180 top
R143 "0 Ohms 0" SM/R_0603 28680,19495 r0 top
S1 "CKN9104CT-ND" MOM-SW 27840,16720 r180 top
S2 "CKN9104CT-ND" MOM-SW 28260,16720 r180 top
SW1 "10 pos spst switch 219-10MST" SW-10pos-SPST 29110,18115 r90 top
TP1 "5016" TEST_PT_SMD 24260,22140 r0 top
TP2 "5016" TEST_PT_SMD 24000,21620 r180 top
TP2V5 "5016" TEST_PT_SMD 24860,17460 r90 top
TP3 "5016" TEST_PT_SMD 23315,21960 r180 top
TP4 "5016" TEST_PT_SMD 24540,22060 r90 top
TP5 "5016" TEST_PT_SMD 25000,22180 r180 top
TP5V "5016" TEST_PT_SMD 24860,17820 r90 top
TP6 "5016" TEST_PT_SMD 25120,21600 r180 top
TP7 "5016" TEST_PT_SMD 27620,17300 r180 top
TP8 "5016" TEST_PT_SMD 26560,21980 r180 top
TP9 "5016" TEST_PT_SMD 28100,20935 r180 top
TP10 "5016" TEST_PT_SMD 28940,20935 r180 top
TP11 "5016" TEST_PT_SMD 26130,20905 r180 top
TP12 "5016" TEST_PT_SMD 26970,20905 r180 top
TP13 "5016" TEST_PT_SMD 28080,20295 r180 top
TP14 "5016" TEST_PT_SMD 28965,20280 r180 top
TP15 "5016" TEST_PT_SMD 26130,20245 r180 top
TP16 "5016" TEST_PT_SMD 26990,20265 r180 top
TP17 "5016" TEST_PT_SMD 28560,22000 r180 top
TP18 "5016" TEST_PT_SMD 28080,19575 r180 top
TP19 "5016" TEST_PT_SMD 28980,19575 r180 top
TP20 "5016" TEST_PT_SMD 26130,19545 r180 top
TP21 "5016" TEST_PT_SMD 26990,19565 r180 top
TP22 "5016" TEST_PT_SMD 28580,21600 r180 top
TP23 "5016" TEST_PT_SMD 26800,21660 r180 top
TP24 "5016" TEST_PT_SMD 24020,20680 r180 top
TP25 "5016" TEST_PT_SMD 24540,20680 r180 top
TP26 "5016" TEST_PT_SMD 27160,22180 r270 top
TP27 "5016" TEST_PT_SMD 28120,22180 r90 top
TP28 "5016" TEST_PT_SMD 27400,17140 r180 top
TP29 "5016" TEST_PT_SMD 27400,17040 r180 top
TP30 "5016" TEST_PT_SMD 28640,17680 r90 top
TP31 "5016" TEST_PT_SMD 27400,16940 r180 top
TP32 "5016" TEST_PT_SMD 27400,16840 r180 top
TP33 "5016" TEST_PT_SMD 27420,17800 r180 top
TP34 "5016" TEST_PT_SMD 27420,17700 r180 top
TP35 "5016" TEST_PT_SMD 27420,17580 r180 top
TP-5V "5016" TEST_PT_SMD 24860,16760 r90 top
TP_-2V5 "5016" TEST_PT_SMD 24860,17120 r90 top
TP_CS0 "5016" TEST_PT_SMD 26330,17990 r180 top
TP_CS1 "5016" TEST_PT_SMD 26330,17810 r180 top
TP_F0 "5016" TEST_PT_SMD 26905,16650 r180 top
TP_F1 "5016" TEST_PT_SMD 26905,16830 r180 top
TP_F2 "5016" TEST_PT_SMD 26905,17030 r180 top
TP_F3 "5016" TEST_PT_SMD 26905,17230 r180 top
TP_F4 "5016" TEST_PT_SMD 26905,17430 r180 top
TP_F5 "5016" TEST_PT_SMD 26905,17630 r180 top
TP_F6 "5016" TEST_PT_SMD 26905,17810 r180 top
TP_F7 "5016" TEST_PT_SMD 26905,17990 r180 top
TP_GND "5016" TEST_PT_SMD 24860,18120 r90 top
TP_GND2 "5016" TEST_PT_SMD 26620,17440 r180 top
TP_MISO "5016" TEST_PT_SMD 26610,17990 r180 top
TP_MOSI "5016" TEST_PT_SMD 26610,17810 r180 top
TP_SCK "5016" TEST_PT_SMD 26610,17630 r180 top
TPSCL "5016" TEST_PT_SMD 27660,17960 r0 top
TPSDA "5016" TEST_PT_SMD 27660,17860 r0 top
U1 "DF206ST-G" BridgeRectifier-DFS 22480,17500 r0 top
U2 "LTC6252" TSOT-23-LTC6252-OpAmp 23920,21960 r270 top
U3 "LTC6254CMS#PBF-ND" MSOP-16Lead-LTC6254 23640,21340 r0 top
U4 "ADG636YRUZ" TSSOP-14Lead-AnalogDevices-ADG636 24275,20760 r0 top
U5 "LTC6252" TSOT-23-LTC6252-OpAmp 24880,21980 r270 top
U6 "ATMEGA32U4-AU" TQFP80P1200X1200X120-44L 28100,17340 r180 top
U7 "LTC6254CMS#PBF-ND" MSOP-16Lead-LTC6254 24880,21340 r0 top
U8 "74HC157DB,112" "SSOP16 NXP" 28230,18305 r0 top
U9 "74HC157DB,112" "SSOP16 NXP" 28215,18785 r0 top
U10 "LTC6254CMS#PBF-ND" MSOP-16Lead-LTC6254 28515,21165 r0 top
U11 "LTC6254CMS#PBF-ND" MSOP-16Lead-LTC6254 26560,21120 r0 top
U12 "LMP8100-ProgrammableGainAmp" SOIC-14pin-National-Semiconductor 27380,22020 r0 top
U13 "LTC6254CMS#PBF-ND" MSOP-16Lead-LTC6254 28520,20525 r0 top
U14 "LTC6254CMS#PBF-ND" MSOP-16Lead-LTC6254 26570,20480 r0 top
U15 "LMP8100-ProgrammableGainAmp" SOIC-14pin-National-Semiconductor 27780,22020 r0 top
U16 "LTC6254CMS#PBF-ND" MSOP-16Lead-LTC6254 28520,19805 r0 top
U17 "LTC6254CMS#PBF-ND" MSOP-16Lead-LTC6254 26570,19785 r0 top
U18 "ADG658YRUZ" TSSOP-16-pin-analog-devices-RU-16 26560,21780 r0 top
U19 "ADG658YRUZ" TSSOP-16-pin-analog-devices-RU-16 28560,21800 r0 top
VR1 "LM317EMP/NOPB" LM317-SOT233-POS-ADJ-VOLT_REG 23700,19500 r0 top
VR2 "LM317EMP/NOPB" LM317-SOT233-POS-ADJ-VOLT_REG 23720,18740 r0 top
VR3 "LM337IMP/NOPB" LM337-ADJ-NEG-VOLT-REG 23740,17900 r0 top
VR4 "LM337IMP/NOPB" LM337-ADJ-NEG-VOLT-REG 23740,17040 r0 top
X1 "PL30-12-130B" TRANSFORMER-DUAL-PRIMARY 21580,19060 r0 top
Y1 "16.000 MHz" ECS/CSM-7/2 27900,17800 r0 top

## Footprints (in the part's own frame and the unit in brackets; to place one, negate y for a bottom-side part, rotate by r counter-clockwise, add the part's x,y. Pads: shape width x height; smd on the part's side, far side on the other; paste and mask are expansions set on the pad)
BNC-RightAngle-PCB-50Ohm-Termination [mil]
  round 62 / inner round 60 / far side round 62 hole 36: 1(14,-506) 2(-86,-506)
  rect 120x120 / inner round 60 / far side rect 120x120 hole 80: A(214,-306) B(-186,-306)
  silkscreen extent -276,-581 304,-16, body extent -276,-581 295,787, height 622
BridgeRectifier-DFS [mm] "DF206ST-G"
  rect 3.5x1.6 smd: 1(0,0) 2(0,-5.25) 3(7.75,-5.25) 4(7.5,0)
  silkscreen extent 0,-7 7.5,1.75
CAP-CAN-SMD-POL-12.5mmDia [mm] "Surface Mount - EEE-1EA100SR"
  oct 5.5x2 smd: 1(-5,0)
  rect 5.5x2 smd: 2(5,0)
  silkscreen extent -5.87,-6.25 5.87,6.25
CAP-SMD-POL-5mmDia [mm] "Surface Mount - EEE-1EA100SR"
  rect 3x1 smd: 1(-2.25,0) 2(2.25,0)
  silkscreen extent -2.75,-2.93 2.75,2.93
ECS/CSM-7/2 [mm]
  rect 5.5x2 smd: 1(0,0) 2(9.5,0)
  silkscreen extent -3,-2.5 12.5,2.5
FCI/75867/6 [mil]
  rect 58x58 hole 37: 1(0,0)
  round 58 hole 37: 2(0,100) 3(100,0) 4(100,100) 5(200,0) 6(200,100)
  silkscreen extent -200,150 400,550
LITEON/LED/0603 [mm] "Chip LED; 0603; Body 1.6 x 0.8 mm (LxW typ)"
  rect 1.1x1 smd: 1(-0.85,0) 2(0.85,0)
  silkscreen extent 0,-0.9 2.1,0.9
LM317-SOT233-POS-ADJ-VOLT_REG [mm] "SOT223, 4-Leads, Body 6.7x7.3mm (max), Pitch 2.30mm, IPC Medium Density"
  rect 2.4x1 smd: 1(-2.9,-2.3) 2(-2.9,2.3) 3(-2.9,0)
  rect 2.4x3.3 smd: 3(2.9,0)
  silkscreen extent -3.02,-3.35 1.3,3.47, body extent -1.85,-3.35 1.85,3.35, height 1.8
LM337-ADJ-NEG-VOLT-REG [mm] "ADJ-NEG-VOLT-REG"
  rect 2.4x1 smd: 1(-2.9,0) 2(-2.9,2.3) 3(-2.9,-2.3)
  rect 2.4x3.3 smd: 1(2.9,0)
  silkscreen extent -3.02,-3.35 1.3,3.47, body extent -1.85,-3.35 1.85,3.35, height 1.8
LOW-PROFILE-SCREWTERMINAL [mil] "TERMINAL SCREW 10/32 .062\"PC MNT"
  oct 180x300 hole 155: 1(-236.22,0) 1(236.22,0)
  oct 236.22x236.22 hole 210: 1(0,0)
  silkscreen extent -364,-226 374,226
M02-LockingHeader-100mil-pitch [mil]
  round 65 hole 45: 1(0,-5) 2(100,5)
  silkscreen extent -89,-89 187,128
MOLEX/54819-0579 [mm]
  rect 0.5x2.25 smd: 1(0,0) 2(0.8,0) 3(1.6,0) 4(2.4,0) 5(3.2,0)
  rect 2.05x4 smd: A(-3.325,-4.225) B(6.525,-4.225)
  rect 2.05x3.5 smd: C(-3.325,0.025) D(6.525,0.025)
  Keep-Out Layer region: -1.473,-6.223 4.674,-6.223 4.674,-5.023 -1.473,-5.023
  silkscreen extent -2.29,-8.25 5.46,-6.6
MOM-SW [mm] "SMD"
  rect 1.8x1.1 smd: 1(0,0) 2(6.2,0) 3(0,-3.7) 4(6.2,-3.7)
  silkscreen extent 2.1,-4.1 4.1,0.4
MSOP-16Lead-LTC6254 [mm] "Quad High Speed OpAmps-LTC6254"
  rect 1.2x0.3 smd: 1(-2.075,1.75) 2(-2.075,1.25) 3(-2.075,0.75) 4(-2.075,0.25) 5(-2.075,-0.25) 6(-2.075,-0.75) 7(-2.075,-1.25) 8(-2.075,-1.75) 9(2.075,-1.75) 10(2.075,-1.25) 11(2.075,-0.75) 12(2.075,-0.25) 13(2.075,0.25) 14(2.075,0.75) 15(2.075,1.25) 16(2.075,1.75)
  silkscreen extent -2.2,-2.05 0.9,2.57, body extent -1.5,-2.05 1.5,2.05, height 1.1
"Resistor-3.2mm x 1.70mm" [mil] "Thru Hole Resistor"
  round 65 hole 35: 1(-200,0)
  round 65 hole 30: 2(200,0)
  silkscreen extent -148,-30 148,30
SM/C_0603 [mil]
  rect 32x38 smd: 1(0,0) 2(56,0)
  silkscreen extent -30,-32 86,32
SM/R_0603 [mil]
  rect 32x38 smd: 1(0,0) 2(56,0)
  silkscreen extent -30,-32 86,32
SM/R_2512 [mil]
  rect 76x120 smd: 1(0,0) 2(236,0)
  silkscreen extent -55,-75 290,75
SOIC-14pin-National-Semiconductor [mm] "SOIC, 14-Leads, Body 8.7x4.0mm (max), Pitch 1.27mm, IPC Medium Density-LMP8100-ProgrammableAmp"
  oval 2.2x0.6 smd: 1(-2.4,3.81) 2(-2.4,2.54) 3(-2.4,1.27) 4(-2.4,0) 5(-2.4,-1.27) 6(-2.4,-2.54) 7(-2.4,-3.81) 8(2.4,-3.81) 9(2.4,-2.54) 10(2.4,-1.27) 11(2.4,0) 12(2.4,1.27) 13(2.4,2.54) 14(2.4,3.81)
  silkscreen extent -2.52,-4.35 0.9,4.78, body extent -1.99,-4.37 1.99,4.37, height 1.75
"SSOP16 NXP" [mm] "74HC157DB,112"
  oval 1.9x0.45 smd: 1(-3.375,2.275) 2(-3.375,1.625) 3(-3.375,0.975) 4(-3.375,0.325) 5(-3.375,-0.325) 6(-3.375,-0.975) 7(-3.375,-1.625) 8(-3.375,-2.275) 9(3.375,-2.275) 10(3.375,-1.625) 11(3.375,-0.975) 12(3.375,-0.325) 13(3.375,0.325) 14(3.375,0.975) 15(3.375,1.625) 16(3.375,2.275)
  silkscreen extent -3.5,-3.2 2.02,3.2, body extent -2.7,-3.2 2.7,3.2, height 1.8
SW-10pos-SPST [mm] "CT21910MST-ND"
  oct 1.12x2.44 smd: 1(0,-4.305)
  rect 1.12x2.44 smd: 2(2.54,-4.305) 3(5.08,-4.305) 4(7.62,-4.305) 5(10.16,-4.305) 6(12.7,-4.305) 7(15.24,-4.305) 8(17.78,-4.305) 9(20.32,-4.305) 10(22.86,-4.305) 11(22.86,4.305) 12(20.32,4.305) 13(17.78,4.305) 14(15.24,4.305) 15(12.7,4.305) 16(10.16,4.305) 17(7.62,4.305) 18(5.08,4.305) 19(2.54,4.305) 20(0,4.305)
  silkscreen extent -2.25,-4.25 25.25,4.25
TEST_PT_SMD [mm] "MINI_SMC_TEST_PT"
  rect 3.4x1.8 smd: 1(0,0)
TQFP80P1200X1200X120-44L [mm] "TQFP, 44-Leads, Body 12.0x12.0mm (max), Pitch 0.80mm, IPC High Density"
  oval 1.3x0.457 smd: 1(-5.6,4) 2(-5.6,3.2) 3(-5.6,2.4) 4(-5.6,1.6) 5(-5.6,0.8) 6(-5.6,0) 7(-5.6,-0.8) 8(-5.6,-1.6) 9(-5.6,-2.4) 10(-5.6,-3.2) 11(-5.6,-4) 23(5.6,-4) 24(5.6,-3.2) 25(5.6,-2.4) 26(5.6,-1.6) 27(5.6,-0.8) 28(5.6,0) 29(5.6,0.8) 30(5.6,1.6) 31(5.6,2.4) 32(5.6,3.2) 33(5.6,4)
  oval 0.457x1.3 smd: 12(-4,-5.6) 13(-3.2,-5.6) 14(-2.4,-5.6) 15(-1.6,-5.6) 16(-0.8,-5.6) 17(0,-5.6) 18(0.8,-5.6) 19(1.6,-5.6) 20(2.4,-5.6) 21(3.2,-5.6) 22(4,-5.6) 34(4,5.6) 35(3.2,5.6) 36(2.4,5.6) 37(1.6,5.6) 38(0.8,5.6) 39(0,5.6) 40(-0.8,5.6) 41(-1.6,5.6) 42(-2.4,5.6) 43(-3.2,5.6) 44(-4,5.6)
  silkscreen extent -5.72,-4.55 4.55,4.95, body extent -5,-5 5,5, height 1.2
TRANSFORMER-DUAL-PRIMARY [mm] "PL5.0-12-130B Tamura-TRANSF TRPL OUT TRANSF LO PRO DUAL 6.3VAC .80A"
  round 4.5 hole 3.56: 0(-22.25,-27.8) 0(-22.25,27.8) 0(22.25,-27.8) 0(22.5,27.8)
  rect 2.25x2.25 hole 1.5: 1(-21.335,17.465) 3(-21.335,3.495) 4(-21.335,-3.495) 6(-21.335,-17.465) 7(21.335,17.465) 9(21.335,3.495) 10(21.335,-3.485) 12(21.335,-17.465)
  silkscreen extent -27.8,-33.35 27.8,33.35
TSOT-23-LTC6252-OpAmp [mm] "Single High Speed OpAmp in TSOT-23 Package"
  rect 0.95x0.55 smd: 1(-1.225,0.95) 2(-1.225,0) 3(-1.225,-0.95) 4(1.225,-0.95) 5(1.225,0) 6(1.225,0.95)
  silkscreen extent -1.35,-1.45 0.35,1.9, body extent -0.87,-1.45 0.88,1.45, height 1
TSSOP-14Lead-AnalogDevices-ADG636 [mm] "TSSOP-14Lead-AnalogDevices-ADG636"
  oval 1.55x0.35 smd: 1(-2.875,1.95) 2(-2.875,1.3) 3(-2.875,0.65) 4(-2.875,0) 5(-2.875,-0.65) 6(-2.875,-1.3) 7(-2.875,-1.95) 8(2.875,-1.95) 9(2.875,-1.3) 10(2.875,-0.65) 11(2.875,0) 12(2.875,0.65) 13(2.875,1.3) 14(2.875,1.95)
  silkscreen extent -3,-2.55 1.7,2.8, body extent -2.25,-2.55 2.25,2.55, height 1
TSSOP-16-pin-analog-devices-RU-16 [mm] "For use with ADG608 analog mux"
  oval 1.55x0.35 smd: 1(-2.875,2.275) 2(-2.875,1.625) 3(-2.875,0.975) 4(-2.875,0.325) 5(-2.875,-0.325) 6(-2.875,-0.975) 7(-2.875,-1.625) 8(-2.875,-2.275) 9(2.875,-2.275) 10(2.875,-1.625) 11(2.875,-0.975) 12(2.875,-0.325) 13(2.875,0.325) 14(2.875,0.975) 15(2.875,1.625) 16(2.875,2.275)
  silkscreen extent -3,-2.55 1.7,3.12, body extent -2.25,-2.55 2.25,2.55, height 1
WICKMANN/WK0011-ND [mm]
  round 2.1 hole 1.3: 1(7.5,0) 2(-7.5,0)
  round 3.683 hole 2.6: 3(0,0)
  silkscreen extent -11.5,-4.5 11.5,4.5
Y2-Caps-Epocs-1uF-10% [mm] "Y2-Caps-Epocs-1uF-10%"
  oct 2.5x2.5 hole 1.5: 1(-18.75,0)
  round 2.5 hole 1.5: 2(18.75,0)
  silkscreen extent -25,-10.25 25,10.25

## Part data
C1 C3 C6 C7 C13 C18 C24 C25: library part 2178, "capacitor, case c, 10uf, 25v; application:general purpose;"
C2 C8 C19 C26: library part 2198, "cap aluminum 1000uf 25vdc 20% 12.5 x 13.5mm smd 1100ma 5000"
C4 C5 C16 C17 C27 C28 C29 C30 C33 C34 C35 C36 C40 C44 C45 C48 C49 C50 C51 C59 C60 C62 C63 C72 C81 C82 C83 C84 C88 C102 C103 C104 C105 C106 C115 C116 C117 C118: library part 2065, "CAP CER 1.0UF 10V 10% X5R 0603"
C9 C10 C11 C12 C14 C15 C20 C21 C31 C32 C37 C38 C42 C43 C46 C47 C52 C53 C54 C55 C56 C57 C58 C61 C64 C66: library part 2205, "capacitor ceramic 1000pf, 50v, c0g, 0603; dielectric"
C22 C23: library part 2202, "Y2 Caps 1uF Epocs"
C39 C41: library part 2187, "ceramic multilayer capacitor; capacitor type:general"
C65 C67 C73 C74 C75 C76 C77 C78 C79 C80 C86 C87 C89 C90 C94 C95 C96 C97 C98 C99 C100 C101 C107 C108 C109 C110 C111 C112: library part 2216, "ceramic multilayer capacitor; capacitor type:general"
C68 C70: library part 2212, "capacitor ceramic 330pf, 50v, c0g, 0603; dielectric"
C69 C71 C85 C91 C92 C93 C113 C114: library part 2217, "ceramic multilayer capacitor; capacitor type:general"
CN1: library part 289, "CONN RECEPT USB MINI-B R/A 5POS SMD"
CON1 CON6 CON7 CON8 CON9: library part 2189, "jack bnc, right angle, pcb; connector type:bnc, coaxial;"
CON2 CON3 CON4 CON5: library part 2184, "header, vertical, 0.1``, 2way; connector type:wire-to-board;"
CON_L1 CON_N1: library part 2177, "brass tin plate low profile 10 - 32 thread with anti"
D1 D2 D3 D4 D_STAT1: library part 2002, "LED SUPER RED CLEAR 0603 SMD"
F1 F2: library part 1045, "FUSEHOLDER OPEN 5X20MM PC MNT"
J1: library part 1838, "CONN HEADER 6POS DUAL R/A PCB"
R1 R37 R120 R121 R122 R123 R124 R125 R130 R131 R132 R133 R134 R135 R136 R137 R138 R139 R140 R141 R142 R143: library part 2207, "res thick film 0603 0 ohm 1/10w molded smd punched carrier"
R2 R38 R39 R80 R103: library part 2208, "; resistance:50ohm; resistance tolerance:± 0.1%; power"
R3 R7 R15 R24 R56: library part 2070, "RES 330 OHM 1/10W 1% 0603 SMD"
R4 R8 R9 R10 R11 R12 R13 R14 R18 R21 R28 R36 R40 R45 R46 R48 R51 R52 R57 R60 R116 R117 R126 R127 R128 R129: library part 2043, "RES 1.00K OHM 1/10W 1% 0603 SMD"
R5 R34 R44 R53: library part 2165, "resistor, 0603, 0.1w, 1%, 10k; resistance:10kohm; resistance"
R6 R35: library part 2182, "resistor, thick film, 30kohm, 100mw, 1%; resistance:30kohm;"
R16 R17 R19 R20 R22 R23 R25 R26 R41 R42 R49 R50 R54 R55 R58 R59: library part 2206, "res, thick film, 2.7mohm, 100mw, 1%; resistance:2.7mohm;"
R27 R32 R33: library part 2233, "Resistor"
R29 R30: library part 2203, "single components passive components resistors"
R31: library part 2204, "single components passive components resistors"
R43 R47: library part 2185, "rating:75v; temperature coefficient"
R61 R62 R63 R64 R65 R66 R67 R68 R69: library part 2165, "Resistor"
R70 R71: library part 2213, "rc series 0603 0.1 w 174 kohms 1% ±100 ppm/°c smt thick film"
R72 R73 R74 R75: library part 2210, "res thick film 0603 1.15k ohm 1% 1/10w ?100ppm/?c molded smd"
R76 R77: library part 2214, "res thick film 0603 249k ohm 1% 1/10w ?100ppm/?c molded smd"
R78 R79 R81 R82: library part 2211, "res 160k ohm 1/10w 1% 0603 smd"
R83 R84 R85 R86: library part 2215, "res thick film 0603 300k ohm 1% 1/10w ±100ppm/°c molded smd"
R87 R88: library part 2221, "resistor, thick film, 15kohm, 100mw, 1%; resistance:15kohm;"
R89 R90: library part 2219, "resistor, rc22h 0603 33k; power rating:0.1w;"
R91 R93: library part 2218, "res thick film 0603 49.9k ohm 1% 1/10w ±100ppm/°c molded smd"
R92 R94: library part 2222, "res thick film 0603 20k ohm 1% 1/10w ?100ppm/?c molded smd"
R95 R96 R99 R100: library part 2220, "resistor, rc22h 0603 12k; resistance:12kohm; resistance"
R97 R98 R101 R102: library part 2223, "res thick film 0603 6.19k ohm 1% 1/10w ±100ppm/°c smd"
R104 R106: library part 2227, "resistor, rc22h 0603 470k; power rating:0.1w;"
R105 R107: library part 2224, "res thick film 0603 7.5k ohm 1% 1/10w ±100ppm/°c molded smd"
R108 R110: library part 2225, "resistor, rc22h 0603 1k; power rating:0.1w;"
R109 R111: library part 2228, "res thick film 0603 4.99k ohm 1% 1/10w ±100ppm/°c smd"
R112 R113 R114 R115: library part 2226, "resistor, rc22h 0603 1k5; power rating:0.1w;"
R118 R119: library part 2229, "res thick film 0603 8.87k ohm 1% 1/10w ±100ppm/°c molded smd"
S1 S2: library part 2128, "SW - SPST-NO - SM"
SW1: library part 2235
TP1 TP2 TP2V5 TP3 TP4 TP5 TP5V TP6 TP7 TP8 TP9 TP10 TP11 TP12 TP13 TP14 TP15 TP16 TP17 TP18 TP19 TP20 TP21 TP22 TP23 TP24 TP25 TP26 TP27 TP28 TP29 TP30 TP31 TP32 TP33 TP34 TP35 TP-5V TP_-2V5 TP_CS0 TP_CS1 TP_F0 TP_F1 TP_F2 TP_F3 TP_F4 TP_F5 TP_F6 TP_F7 TP_GND TP_GND2 TP_MISO TP_MOSI TP_SCK TPSCL TPSDA: library part 2231, "test point, connector; connector type:test; mounting type:pc"
U1: library part 2179, "schottky diode; operating temperature range:0°c to +70°c;"
U2 U5: library part 2192, "op amp, r/r 200mhz single, soic8; no. of amplifiers:1; op amp"
U3 U7 U10 U11 U13 U14 U16 U17: library part 2191, "op amp, dual, r-r, 180mhz, 8msop; op amp type:unity gain"
U4: library part 2209, "switch, spdt dual, tssop14, 636; switch type, analogue:spdt;"
U6: library part 2175, "mcu, 8bit, avr, 32k flash, usb, 44tqfp; eeprom memory"
U8 U9: library part 2234, "ic quad 2-in mux 16-ssop"
U12 U15: library part 2236
U18 U19: library part 2230, "mux, 8-ch, smd, tssop16, 658; analogue multiplexer"
VR1 VR2: library part 2181, "v reg, linear, 37v, smd; voltage regulator type:adjustable"
VR3 VR4: library part 2183, "linear voltage regulator ic; output voltage adjustable"
X1: library part 2197, "transformers 12.6vct @ 2.40a 6.3v @ 4.80a"
Y1: library part 1075, "CRYSTAL 16.00MHZ 20PF SMD"

## Free pads (board coordinates)
  round 157.48 hole 137.8: 0(20500,16700) 0(20500,22700) 0(28500,16700) 0(28500,22700)
  round 60 hole 35: 0(22825,20630) 0(22825,20955) 0(22825,21250) 0(22825,21575) 0(24285,18335) 0(24285,18660) 0(24285,18955) 0(24285,19280) 0(24725,19065) 0(24725,19390) 0(24725,19685) 0(24725,20010) 0(25085,18215) 0(25090,17475) 0(25115,19685) 0(25115,20010) 0(25115,20305) 0(25115,20630) 0(25410,18215) 0(25415,17475) 0(25705,18215) 0(25710,17475) 0(25725,19685) 0(25725,20010) 0(25725,20305) 0(25725,20630) 0(26030,18215) 0(26035,17475) 0(26475,22315) 0(26475,22640) 0(27135,19125) 0(27145,21145) 0(27460,19125) 0(27595,19675) 0(27595,20000) 0(27595,20295) 0(27595,20620) 0(27600,22345) 0(27600,22670) 0(27755,19125) 0(28080,19125) 0(28805,22355) 0(28805,22680) 0(29250,21645) 0(29250,21970) 0(29255,22350) 0(29255,22675) 1(27190,20515) 2(27910,20540) 3(27960,21220) 4(27235,19840) 5(27855,19835) 6(29060,20175) 7(29080,20375) 8(29070,21010) 9(28170,21625) 10(26350,21500)

## Via types
v1: diameter 40/36/36 (per signal layer), hole 16, Top Layer to Bottom Layer, tented both sides, 213 vias
v2: diameter 36, hole 16, Top Layer to Bottom Layer, 2 vias
v3: diameter 40/36/36 (per signal layer), hole 16, Top Layer to Bottom Layer, 1 vias
v4: diameter 35/36/36 (per signal layer), hole 16, Top Layer to Bottom Layer, tented both sides, 1 vias
v5: diameter 40/46/46 (per signal layer), hole 16, Top Layer to Bottom Layer, tented both sides, 1 vias
v6: diameter 60, hole 35, Top Layer to Bottom Layer, tented both sides, 1 vias
v7: diameter 65, hole 35, Top Layer to Bottom Layer, tented both sides, 1 vias